# EAGLE board ControlParqueadero (EAGLE 5.07)
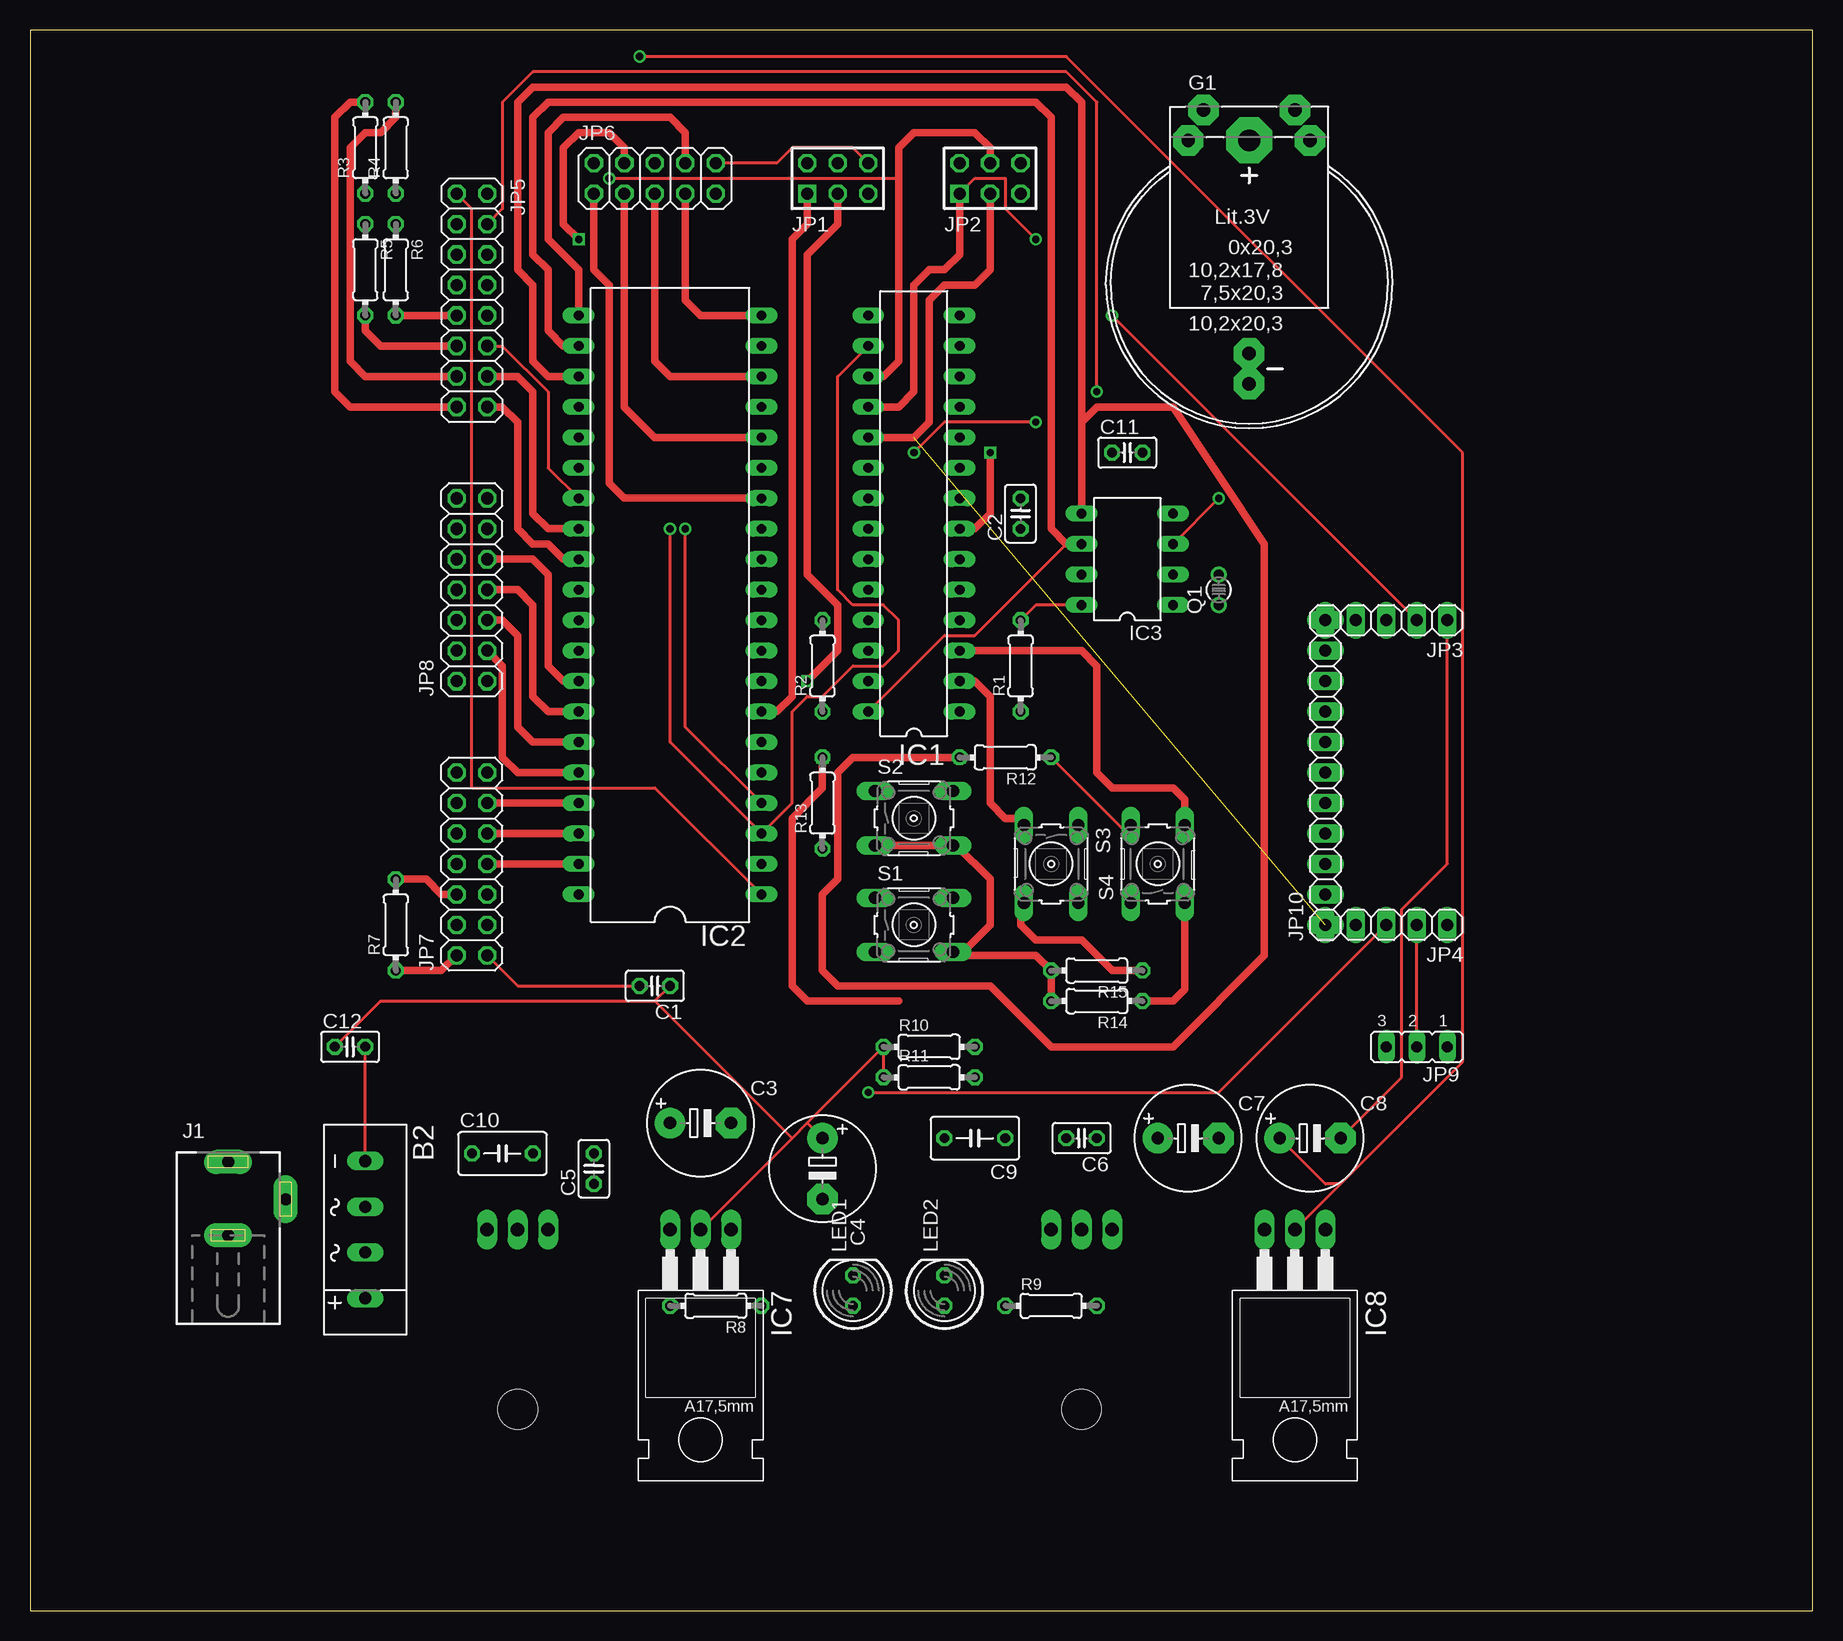
[diagram p0: board, top side]
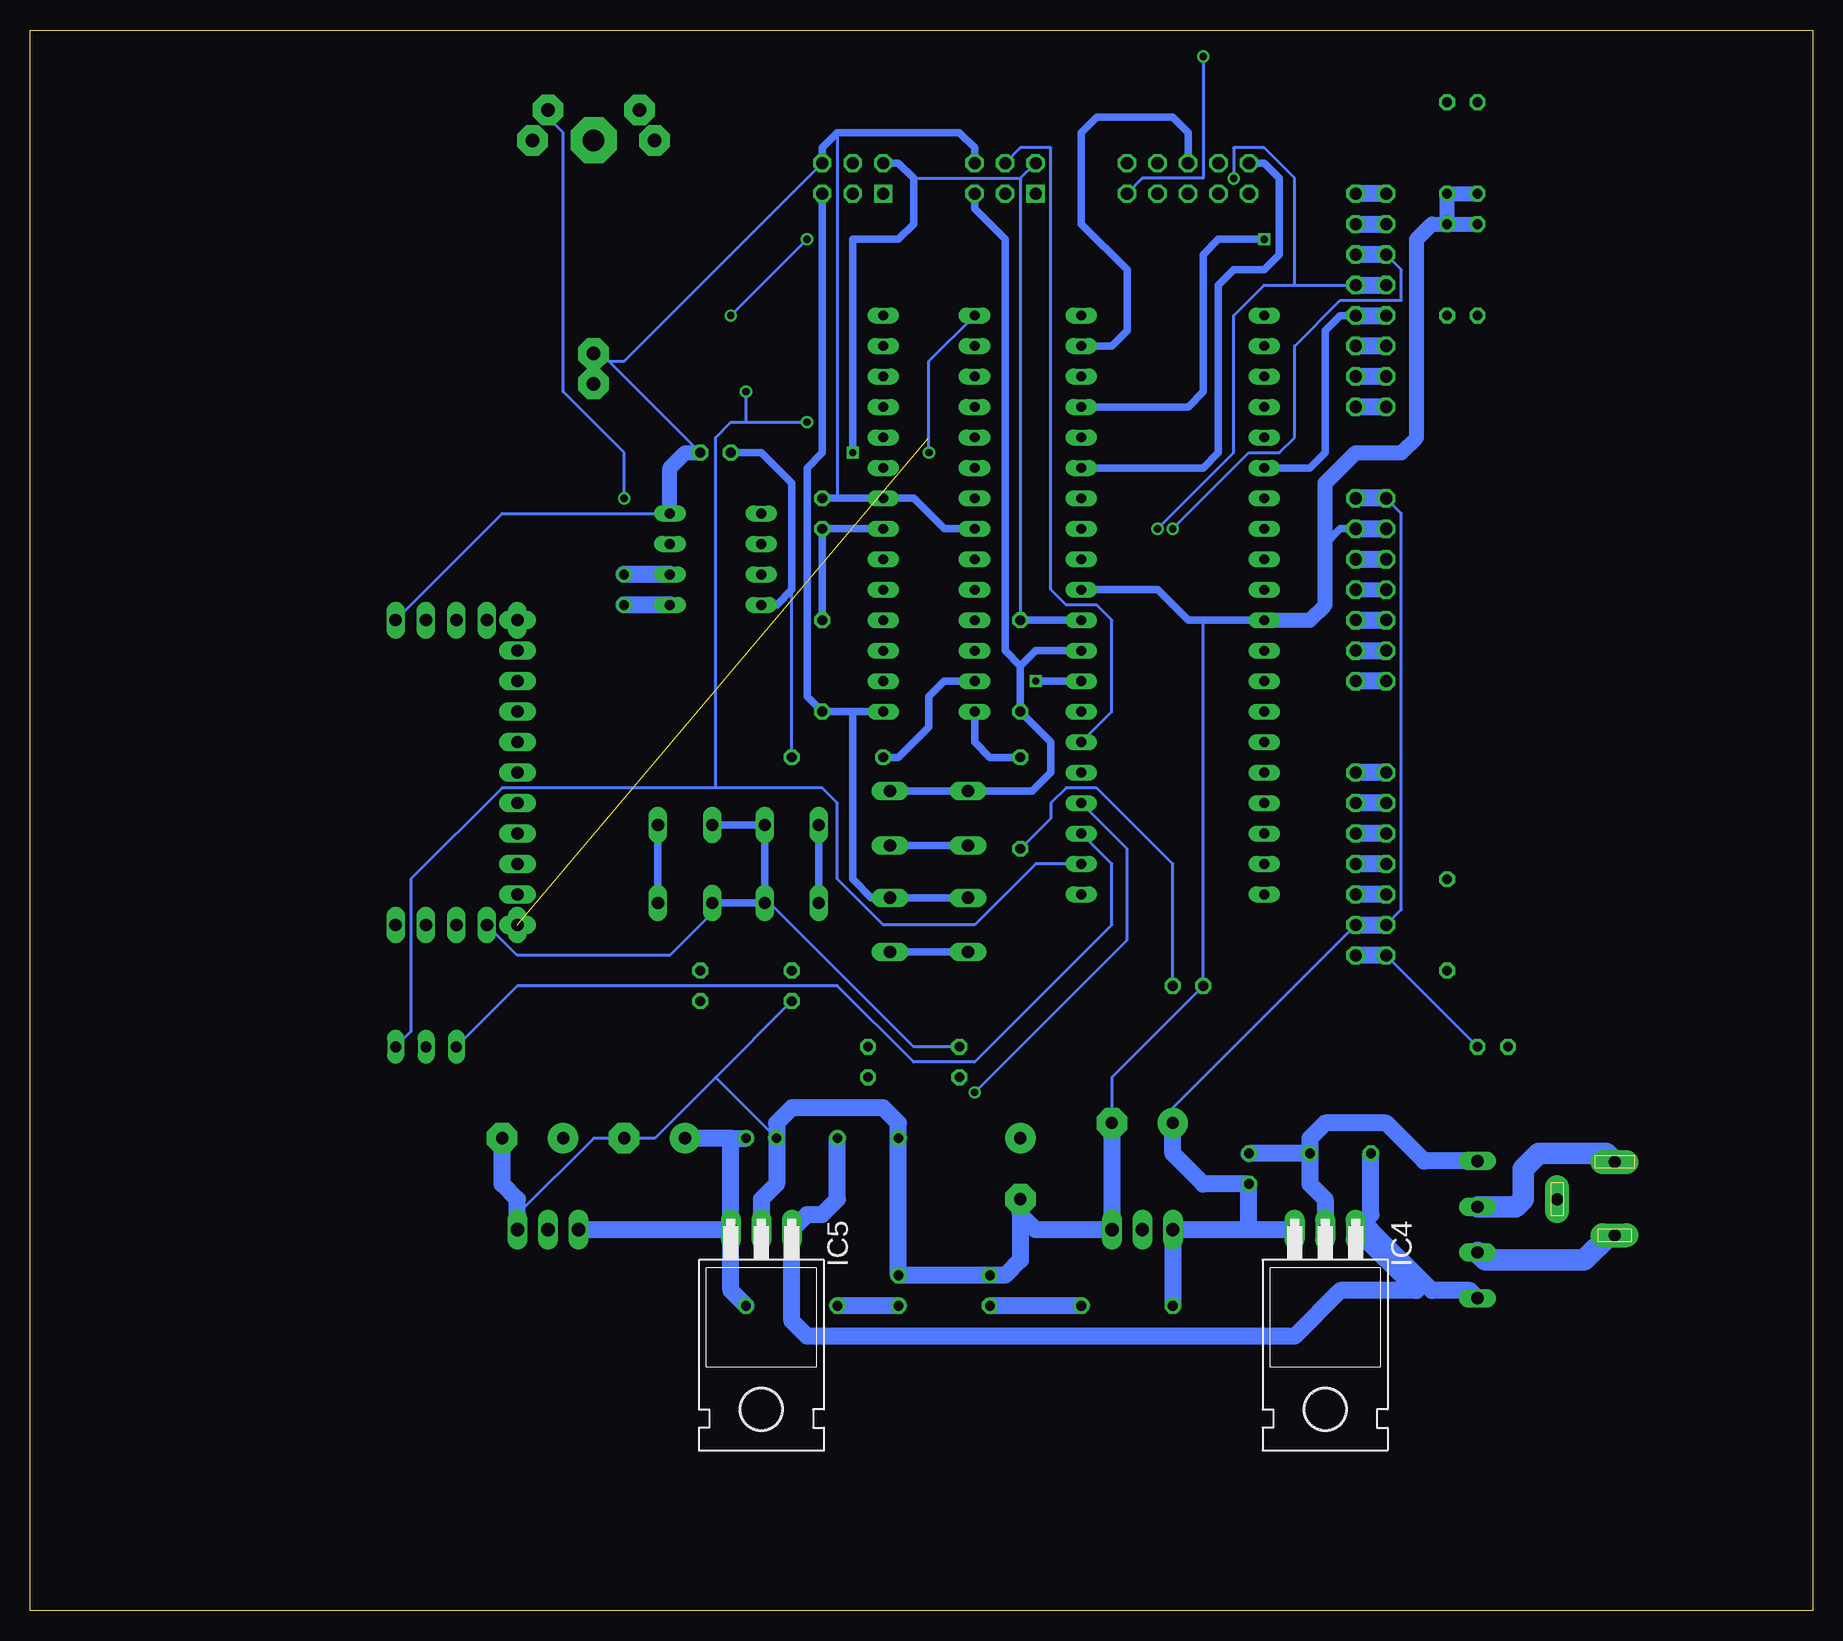
[diagram p1: board, bottom side, seen from below]

Size 148.57 x 131.75 mm. Coordinates in mm from the lower left corner, seen from the top.
Outline: 0,0 148.57,0 148.57,131.75 0,131.75 0,0
Copper layers (1*16): Top 0.035mm / dielectric 1.5mm / Bottom 0.035mm
Design rules "default": minimum track width 10mil, minimum drill 24mil, track to track 8mil, track to pad 8mil, pad to pad 8mil, via to via 8mil, smd to smd 8mil, copper to edge 40mil, drill to drill 8mil, minimum pad ring 10mil, minimum via ring 8mil, stop-mask expansion 4mil, vias tented up to drill 0mil, thermal gap 10mil

## Footprints (pad centres in the part's own frame; a part is rotated, then mirrored left to right if it is on the bottom)
2KBP = drill 1.016 long: + 5.715,0; - -5.715,0; AC1 -1.905,0; AC2 1.905,0
C025-025X050 = drill 0.813 octagon: 1 -1.27,0; 2 1.27,0
E5-8,5 = drill 1.016 pad 2.54 round: + -2.54,0 | drill 1.016 pad 2.54 octagon: - 2.54,0
C050-035X075 = drill 0.813 octagon: 1 -2.54,0; 2 2.54,0
B2430UNI = drill 1.118 pad 2.54 octagon: + 3.81,14.605; +@1 -3.81,14.605; +@2 -5.08,12.065; +@3 5.08,12.065; - 0,-5.715; -@1 0,-8.255 | drill 1.803 pad 3.81 octagon: +@4 0,12.065
DIL28-3 = drill 0.813 long: 1 -16.51,-3.81; 2 -13.97,-3.81; 3 -11.43,-3.81; 4 -8.89,-3.81; 5 -6.35,-3.81; 6 -3.81,-3.81; 7 -1.27,-3.81; 8 1.27,-3.81; 9 3.81,-3.81; 10 6.35,-3.81; 11 8.89,-3.81; 12 11.43,-3.81; 13 13.97,-3.81; 14 16.51,-3.81; 15 16.51,3.81; 16 13.97,3.81; 17 11.43,3.81; 18 8.89,3.81; 19 6.35,3.81; 20 3.81,3.81; 21 1.27,3.81; 22 -1.27,3.81; 23 -3.81,3.81; 24 -6.35,3.81; 25 -8.89,3.81; 26 -11.43,3.81; 27 -13.97,3.81; 28 -16.51,3.81
DIL40 = drill 0.813 long: 1 -24.13,-7.62; 2 -21.59,-7.62; 3 -19.05,-7.62; 4 -16.51,-7.62; 5 -13.97,-7.62; 6 -11.43,-7.62; 7 -8.89,-7.62; 8 -6.35,-7.62; 9 -3.81,-7.62; 10 -1.27,-7.62; 11 1.27,-7.62; 12 3.81,-7.62; 13 6.35,-7.62; 14 8.89,-7.62; 15 11.43,-7.62; 16 13.97,-7.62; 17 16.51,-7.62; 18 19.05,-7.62; 19 21.59,-7.62; 20 24.13,-7.62; 21 24.13,7.62; 22 21.59,7.62; 23 19.05,7.62; 24 16.51,7.62; 25 13.97,7.62; 26 11.43,7.62; 27 8.89,7.62; 28 6.35,7.62; 29 3.81,7.62; 30 1.27,7.62; 31 -1.27,7.62; 32 -3.81,7.62; 33 -6.35,7.62; 34 -8.89,7.62; 35 -11.43,7.62; 36 -13.97,7.62; 37 -16.51,7.62; 38 -19.05,7.62; 39 -21.59,7.62; 40 -24.13,7.62
DIL08 = drill 0.813 long: 1 -3.81,-3.81; 2 -1.27,-3.81; 3 1.27,-3.81; 4 3.81,-3.81; 5 3.81,3.81; 6 1.27,3.81; 7 -1.27,3.81; 8 -3.81,3.81
TO220H = drill 1.118 long: 1 -2.54,-10.16; 2 0,-10.16; 3 2.54,-10.16 | hole 3.302: 0,4.826
TO220 = drill 1.118 long: 1 -2.54,-6.35; 2 0,-6.35; 3 2.54,-6.35
DCJ0202 = drill 1 pad 2 long: 1 0,3.1; 2 4.8,0; 3 0,-3
AVR-ISP-6 = drill 1.016 square: 1 -2.54,-1.27 | drill 1.016 octagon: 2 -2.54,1.27; 3 0,-1.27; 4 0,1.27; 5 2.54,-1.27; 6 2.54,1.27
1X05 = drill 1.016 long: 1 -5.08,0; 2 -2.54,0; 3 0,0; 4 2.54,0; 5 5.08,0
2X08 = drill 1.016 octagon: 1 -8.89,-1.27; 2 -8.89,1.27; 3 -6.35,-1.27; 4 -6.35,1.27; 5 -3.81,-1.27; 6 -3.81,1.27; 7 -1.27,-1.27; 8 -1.27,1.27; 9 1.27,-1.27; 10 1.27,1.27; 11 3.81,-1.27; 12 3.81,1.27; 13 6.35,-1.27; 14 6.35,1.27; 15 8.89,-1.27; 16 8.89,1.27
2X05 = drill 1.016 octagon: 1 -5.08,-1.27; 2 -5.08,1.27; 3 -2.54,-1.27; 4 -2.54,1.27; 5 0,-1.27; 6 0,1.27; 7 2.54,-1.27; 8 2.54,1.27; 9 5.08,-1.27; 10 5.08,1.27
2X07 = drill 1.016 octagon: 1 -7.62,-1.27; 2 -7.62,1.27; 3 -5.08,-1.27; 4 -5.08,1.27; 5 -2.54,-1.27; 6 -2.54,1.27; 7 0,-1.27; 8 0,1.27; 9 2.54,-1.27; 10 2.54,1.27; 11 5.08,-1.27; 12 5.08,1.27; 13 7.62,-1.27; 14 7.62,1.27
JP2 = drill 0.914 long: 1 -2.54,0; 2 0,0; 3 2.54,0
1X11 = drill 1.016 long: 1 -12.7,0; 2 -10.16,0; 3 -7.62,0; 4 -5.08,0; 5 -2.54,0; 6 0,0; 7 2.54,0; 8 5.08,0; 9 7.62,0; 10 10.16,0; 11 12.7,0
LED5MM = drill 0.813 octagon: A -1.27,0; K 1.27,0
TC26V = drill 0.813 round: 1 -1.27,0; 2 1.27,0
0204/7 = drill 0.813 octagon: 1 -3.81,0; 2 3.81,0
B3F-10XX = drill 1.016 long: 1 -3.251,2.261; 2 3.251,2.261; 3 -3.251,-2.261; 4 3.251,-2.261

## Placement (x,y rotation side)
B2  RECTIFIER-2KBP  [2KBP]  27.94,31.75 270 top
C1  [C025-025X050]  52.07,52.07 180 top
C2  [C025-025X050]  82.55,91.44 90 top
C3  [E5-8,5]  55.88,40.64 0 top
C4  [E5-8,5]  66.04,36.83 270 top
C5  0.1u  [C025-025X050]  46.99,36.83 90 top
C6  0.1u  [C025-025X050]  87.63,39.37 180 top
C7  [E5-8,5]  96.52,39.37 0 top
C8  [E5-8,5]  106.68,39.37 0 top
C9  0.33u  [C050-035X075]  78.74,39.37 180 top
C10  0.33u  [C050-035X075]  39.37,38.1 0 top
C11  [C025-025X050]  91.44,96.52 0 top
C12  [C025-025X050]  26.67,46.99 0 top
G1  B2430UNI  [B2430UNI]  101.6,110.49 0 top
IC1  ATMEGA48/88/168-PU  [DIL28-3]  73.66,91.44 90 top
IC2  MEGA164P/324P/644P-PU  [DIL40]  53.34,83.82 90 top
IC3  DS1307  [DIL08]  91.44,87.63 90 top
IC4  7805T  [TO220H]  40.64,21.59 180 bottom
IC5  7805T  [TO220H]  87.63,21.59 180 bottom
IC7  LM1117T-ADJ  [TO220]  55.88,25.4 180 top
IC8  LM1117T-ADJ  [TO220]  105.41,25.4 180 top
J1  DCJ0202  [DCJ0202]  16.51,34.29 0 top
JP1  AVR-ISP-6  [AVR-ISP-6]  67.31,119.38 0 top
JP2  AVR-ISP-6  [AVR-ISP-6]  80.01,119.38 0 top
JP3  [1X05]  113.03,82.55 180 top
JP4  [1X05]  113.03,57.15 180 top
JP5  [2X08]  36.83,109.22 270 top
JP6  [2X05]  52.07,119.38 0 top
JP7  [2X07]  36.83,62.23 90 top
JP8  [2X07]  36.83,85.09 90 top
JP9  [JP2]  115.57,46.99 180 top
JP10  [1X11]  107.95,69.85 90 top
LED1  [LED5MM]  68.58,26.67 90 top
LED2  [LED5MM]  76.2,26.67 90 top
Q1  [TC26V]  99.06,85.09 90 top
R1  1K  [0204/7]  82.55,78.74 90 top
R2  1K  [0204/7]  66.04,78.74 90 top
R3  1K  [0204/7]  27.94,121.92 90 top
R4  1K  [0204/7]  30.48,121.92 90 top
R5  1K  [0204/7]  27.94,111.76 270 top
R6  1K  [0204/7]  30.48,111.76 270 top
R7  [0204/7]  30.48,57.15 90 top
R8  330  [0204/7]  57.15,25.4 180 top
R9  270  [0204/7]  85.09,25.4 0 top
R10  1K  [0204/7]  74.93,46.99 0 top
R11  1K  [0204/7]  74.93,44.45 0 top
R12  1K  [0204/7]  81.28,71.12 180 top
R13  1K  [0204/7]  66.04,67.31 90 top
R14  1K  [0204/7]  88.9,50.8 180 top
R15  1K  [0204/7]  88.9,53.34 180 top
S1  [B3F-10XX]  73.66,57.15 0 top
S2  [B3F-10XX]  73.66,66.04 0 top
S3  [B3F-10XX]  85.09,62.23 270 top
S4  [B3F-10XX]  93.98,62.23 90 top

## Library data of the parts
B2 = rectifier
C1-C12 R1-R15 = rcl
G1 = battery
IC1 = atmega8
IC2 JP1 JP2 = avr-6
IC3 = ds1307_pcf8583
IC4 IC5 = linear
IC7 IC8 = lm1117
J1 = con-jack
JP3-JP8 JP10 = pinhead
JP9 = jumper
LED1 LED2 = led
Q1 = crystal
S1-S4 = switch-omron

## Nets
+3V3: C1.1 C2.1 C4.+ C11.1 C12.1 IC1.7 IC2.10 IC3.8 IC7.2 JP1.2 JP2.2 JP4.4 R1.2 R2.2 R10.1 R11.1 R12.1 R13.1 S3.1 S3.2 S4.1 S4.2
+5V: C3.+ C5.1 IC4.3 IC7.3 JP7.3 JP7.4 JP8.13 JP8.14 R8.2
+5V/1: C6.1 C7.+ IC5.3 IC8.3 R9.2
+9V: B2.+ C9.1 C10.1 IC4.1 IC5.1
AREF: IC2.32
AVCC: IC2.30
GND: B2.- C1.2 C2.2 C3.- C4.- C5.2 C6.2 C7.- C8.- C9.2 C10.2 C11.2 C12.2 G1.- IC1.8 IC1.22 IC2.11 IC2.31 IC3.4 IC4.2 IC5.2 IC7.1 IC8.1 JP1.6 JP2.6 JP3.1 JP6.10 JP7.1 JP7.2 JP8.11 JP8.12 LED1.K LED2.K R3.1 R4.1 R5.1 R6.1 R7.1 R14.2 R15.2 S1.3 S1.4 S2.3 S2.4
N$1: IC1.1 JP2.5 R1.1 S1.1 S1.2
N$2: IC1.2 R15.1 S3.3 S3.4
N$3: IC2.9 JP1.5 R2.1 S2.1 S2.2
N$4: IC1.3 R14.1 S4.3 S4.4
N$5: JP4.2 JP9.2
N$6: IC2.7 JP1.1
N$7: IC2.6 JP1.4
N$8: IC2.8 JP1.3
N$9: IC1.27 IC2.23 IC3.5 R12.2
N$11: IC1.28 IC2.22 IC3.6 R13.2
N$13: IC2.28 JP5.13 JP5.14 R4.2
N$16: IC2.26 JP5.9 JP5.10 R6.2
N$18: IC2.27 JP5.11 JP5.12 R5.2
N$19: IC3.2 Q1.2
N$20: IC2.29 JP5.15 JP5.16 R3.2
N$21: LED1.A R8.1
N$22: G1.+ IC3.3
N$23: B2.AC1 J1.1
N$24: B2.AC2 J1.3
N$25: LED2.A R9.1
N$27: IC2.33 JP8.9 JP8.10
N$28: IC2.34 JP8.7 JP8.8
N$29: IC2.35 JP8.5 JP8.6
N$30: IC2.36 JP8.3 JP8.4
N$32: IC3.1 Q1.1
N$37: JP7.5 JP7.6 R7.2
N$38: IC2.39 JP7.7 JP7.8
N$39: IC2.38 JP7.9 JP7.10
N$40: IC2.37 JP7.11 JP7.12
N$41: JP7.13 JP7.14
N$42: JP8.1 JP8.2
PORTB0: IC2.1 JP5.1 JP5.2
PORTB1: IC1.15 IC2.2 JP5.3 JP5.4 JP9.1
PORTB2: IC1.16 IC2.3 JP5.5 JP5.6 JP9.3
PORTB3: IC1.17 IC2.4 JP2.4 JP4.3 JP5.7 JP5.8
PORTB4: IC1.18 JP2.1 JP3.2
PORTB5: IC1.19 JP2.3 JP4.5
PORTC0: IC2.14 JP6.1
PORTC1: IC2.15 JP6.2
PORTC2: IC2.16 JP6.3
PORTC3: IC2.17 JP6.4
PORTC4: IC2.18 JP6.5
PORTC5: IC2.19 JP6.6
PORTC6: IC2.20 JP6.7
PORTC7: IC2.21 JP6.8
VCC: C8.+ IC8.2 JP6.9

## Tracks (layer width: path | path; a pad name or v marks a point on that pad's centre or on a via)
+3V3  (via drill 0.6)
  Top 0.254: R11.1 R10.1 64.77,40.64 | 63.5,39.37 64.77,40.64 | 63.5,39.37 IC7.2 | 64.77,40.64 C4.+ | C12.1 29.21,50.8 52.07,50.8 | 52.07,50.8 C1.1 | 52.07,50.8 63.5,39.37 | R12.1 91.44,64.77 S4.2 | IC3.8 83.82,83.82 R1.2
  Top 0.61: v80.01,96.52 80.01,91.44 78.74,90.17 IC1.7
  Bottom 0.254: R13.1 63.5,66.04 63.5,67.31 62.23,68.58 59.69,68.58 53.34,62.23 C1.1 | JP4.4 107.95,54.61 95.25,54.61 91.44,58.42 S4.1 | 66.04,119.38 JP1.2 | 74.93,119.38 66.04,119.38 | 66.04,119.38 R2.2 | R12.1 85.09,85.09 | R10.1 74.93,46.99 87.63,59.69 S3.2
  Bottom 0.61: R2.2 IC2.10 | S3.1 S3.2 S4.1 | S3.1 S4.2 | S3.1 87.35,65.05 87.63,64.77 | IC1.7 C2.1 R1.2 | JP2.2 76.2,120.65 74.93,119.38 74.93,115.57 76.2,114.3 80.01,114.3 v80.01,96.52 | C11.1 87.63,96.52 85.09,93.98 85.09,85.09 86.36,83.82 IC3.8
+5V
  Bottom 0.254: JP7.3 53.34,41.91 C3.+ | JP8.14 34.29,91.44 34.29,58.42 JP7.4
  Bottom 1.422: IC4.3 46.99,31.75 | 46.99,31.75 IC7.3 R8.2 | 46.99,31.75 C5.1 50.8,35.56 53.34,38.1 C3.+ | JP8.14 JP8.13 | JP7.3 JP7.4
+5V/1
  Bottom 1.422: IC5.3 90.17,39.37 | 90.17,39.37 C6.1 | 90.17,39.37 C7.+ | R9.2 90.17,26.67 IC5.3 | IC5.3 IC8.3
+9V
  Bottom 1.422: IC4.1 36.83,31.75 31.75,26.67 28.57,26.67 B2.+ | IC4.1 36.83,33.02 C10.1 | IC4.1 33.02,26.67 39.37,26.67 43.18,22.86 83.82,22.86 85.09,24.13 IC5.1 83.82,33.02 82.55,33.02 81.28,34.29 C9.1
GND
  Top 0.254: JP6.10 62.23,120.65 63.5,121.92 68.58,121.92 JP1.6 | B2.- C12.2 | C1.2 40.64,52.07 JP7.1 | JP3.1 118.11,62.23 114.3,58.42 114.3,44.45 C8.-
  Top 0.61: R14.2 R15.2 83.82,54.61 77.47,54.61 | 77.47,54.61 77.19,54.61 S1.4 | JP7.2 34.29,53.34 R7.1 | S2.3 77.19,63.78 80.01,60.96 80.01,57.15 77.47,54.61
  Bottom 0.254: JP3.1 109.22,91.44 IC3.4 | 100.33,104.14 101.6,104.14 G1.- | C11.2 100.33,104.14 | JP2.6 99.06,104.14 100.33,104.14 | 81.28,123.19 81.28,92.71 | 107.95,33.02 101.6,39.37 C7.- 96.52,39.37 91.44,44.45 | 91.44,44.45 R14.2 | C6.2 91.44,44.45 | C12.2 JP7.2 | C3.- 58.42,44.45 C1.2 50.8,82.55
  Bottom 0.61: JP8.11 39.37,90.17 40.64,88.9 40.64,83.82 | S1.4 S1.3 | S2.3 S2.4 | C2.2 81.28,92.71 IC1.8 74.93,92.71 72.39,90.17 IC1.22 | JP2.6 82.55,121.92 81.28,123.19 71.12,123.19 69.85,121.92 JP1.6 | IC2.31 50.8,82.55 52.07,82.55 54.61,85.09 IC2.11
  Bottom 1.27: R6.1 R5.1 | R3.1 R4.1 R6.1 | IC2.31 41.91,82.55 40.64,83.82 40.64,93.98 38.1,96.52 34.29,96.52 33.02,97.79 33.02,114.3 31.75,115.57 R6.1 | IC3.4 95.25,95.25 93.98,96.52 C11.2
  Bottom 1.422: IC4.2 40.64,34.29 41.91,35.56 C10.2 | C10.2 C5.2 | B2.- 32.39,37.47 35.56,40.64 40.64,40.64 41.91,39.37 C10.2 | C3.- IC7.1 64.77,31.75 66.04,33.02 | 66.04,33.02 66.04,29.21 67.31,27.94 LED1.K LED2.K C9.2 76.2,40.64 77.47,41.91 85.09,41.91 86.36,40.64 C6.2 86.36,35.56 87.63,34.29 IC5.2 | 66.04,33.02 C4.- | IC8.1 107.95,33.02 107.95,34.29 109.22,35.56 C8.- | JP8.11 JP8.12 | JP7.2 JP7.1
N$1
  Bottom 0.61: 80.01,74.93 R1.1 83.82,76.2 83.82,95.25 82.55,96.52 JP2.5 | 80.01,74.93 IC1.1 | S1.1 S1.2 78.46,59.41 80.01,60.96 80.01,74.93
N$2
  Top 0.61: IC1.2 78.74,77.47 80.01,76.2 80.01,67.31 81.28,66.04 82.27,66.04 S3.3 | R15.1 90.17,53.34 87.63,55.88 83.82,55.88 82.55,57.15 82.55,58.7 S3.4
  Bottom 0.61: S3.4 S3.3
N$3
  Bottom 0.61: S2.2 S2.1 65.05,68.3 63.5,69.85 63.5,72.39 R2.1 66.04,78.74 | 66.04,78.74 64.77,80.01 IC2.9 | JP1.5 69.85,116.84 67.31,114.3 67.31,80.01 66.04,78.74
N$4
  Top 0.61: S4.4 96.24,67.59 95.25,68.58 90.17,68.58 88.9,69.85 88.9,78.74 87.63,80.01 IC1.3 | S4.3 96.24,51.79 95.25,50.8 R14.1
  Bottom 0.61: S4.3 S4.4
N$5
  Top 0.254: JP9.2 JP4.2
N$6
  Top 0.61: JP1.1 64.77,115.57 63.5,114.3 63.5,76.2 62.23,74.93 IC2.7
N$7
  Bottom 0.254: IC2.6 58.42,74.93 58.42,82.55 59.69,83.82 62.23,83.82 63.5,85.09 63.5,121.92 66.04,121.92 JP1.4
N$8  (via drill 0.6)
  Top 0.61: v64.77,77.47 67.31,80.01 67.31,83.82 64.77,86.36 64.77,113.03 67.31,115.57 JP1.3
  Bottom 0.61: IC2.8 v64.77,77.47
N$9  (via drill 0.6)
  Top 0.61: 87.63,99.06 87.63,125.73 86.36,127 41.91,127 40.64,125.73 40.64,111.76 41.91,110.49 41.91,104.14 43.18,102.87 IC2.23 | 87.63,99.06 IC3.5 | 87.63,99.06 88.9,100.33 95.25,100.33 102.87,88.9 102.87,54.61 95.25,46.99 85.09,46.99 80.01,52.07 67.31,52.07 66.04,53.34 66.04,59.69 67.31,60.96 67.31,69.85 68.58,71.12 R12.2
  Bottom 0.61: IC1.27 72.39,77.47 73.66,76.2 73.66,73.66 76.2,71.12 R12.2
  other vias: 77.47,71.12
N$11  (via drill 0.6)
  Top 0.254: IC1.28 76.2,81.28 78.74,81.28 86.36,88.9
  Top 0.61: IC3.6 86.36,88.9 85.09,90.17 85.09,124.46 83.82,125.73 43.18,125.73 41.91,124.46 41.91,113.03 43.18,111.76 43.18,106.68 44.45,105.41 IC2.22 | R13.2 66.04,68.58 63.5,66.04 63.5,52.07 64.77,50.8 72.39,50.8
  Bottom 0.61: IC1.28 69.85,72.39 68.58,71.12 R13.2
  other vias: 66.04,71.12
N$13
  Top 0.61: JP5.14 40.64,102.87 41.91,101.6 41.91,91.44 43.18,90.17 IC2.28 | JP5.13 27.94,102.87 26.67,104.14 26.67,121.92 27.94,123.19 29.21,123.19 30.48,124.46 R4.2
  Bottom 1.422: JP5.13 JP5.14
N$16
  Top 0.61: JP5.9 R6.2
  Bottom 0.61: JP5.10 39.37,107.95 40.64,106.68 40.64,96.52 41.91,95.25 IC2.26
  Bottom 1.422: JP5.10 JP5.9
N$18
  Top 0.254: IC2.27 43.18,95.25 43.18,101.6 39.37,105.41 JP5.12
  Top 0.61: R5.2 27.94,106.68 29.21,105.41 JP5.11
  Bottom 1.422: JP5.11 JP5.12
N$19
  Bottom 1.422: IC3.2 Q1.2
N$20
  Top 0.61: IC2.29 44.45,87.63 43.18,88.9 41.91,88.9 40.64,90.17 40.64,99.06 39.37,100.33 JP5.16 | R3.2 26.67,125.73 25.4,124.46 25.4,101.6 26.67,100.33 JP5.15
  Bottom 1.422: JP5.15 JP5.16
N$21
  Bottom 1.422: R8.1 LED1.A
N$22  (via drill 0.61)
  Top 0.254: IC3.3 v99.06,92.71
  Bottom 0.254: v99.06,92.71 99.06,96.52 104.14,101.6 104.14,123.19 105.41,124.46 G1.+
N$23
  Bottom 1.778: B2.AC1 24.77,33.66 24.13,34.29 24.13,36.83 22.86,38.1 17.22,38.1 J1.1
N$24
  Bottom 1.778: J1.3 16.97,31.29 19.05,29.21 27.3,29.21 B2.AC2
N$25
  Bottom 1.422: LED2.A R9.1
N$27
  Top 0.61: JP8.9 41.91,87.63 43.18,86.36 43.18,78.74 44.45,77.47 IC2.33
  Bottom 1.422: JP8.9 JP8.10
N$28
  Top 0.61: JP8.7 40.64,85.09 41.91,83.82 41.91,76.2 43.18,74.93 IC2.34
  Bottom 1.27: JP8.7 JP8.8
N$29
  Top 0.61: JP8.5 39.37,82.55 40.64,81.28 40.64,73.66 41.91,72.39 IC2.35
  Bottom 1.422: JP8.5 JP8.6
N$30
  Top 0.61: JP8.3 39.37,78.74 39.37,71.12 40.64,69.85 IC2.36
  Bottom 1.422: JP8.3 JP8.4
N$32
  Bottom 1.422: IC3.1 Q1.1
N$37
  Top 0.61: R7.2 33.02,60.96 34.29,59.69 JP7.6
  Bottom 1.422: JP7.6 JP7.5
N$38
  Top 0.61: JP7.7 IC2.39
  Bottom 1.422: JP7.8 JP7.7
N$39
  Top 0.61: JP7.9 IC2.38
  Bottom 1.422: JP7.10 JP7.9
N$40
  Top 0.61: JP7.11 IC2.37
  Bottom 1.422: JP7.12 JP7.11
N$41
  Bottom 1.422: JP7.14 JP7.13
N$42
  Bottom 1.422: JP8.2 JP8.1
PORTB0
  Top 0.254: IC2.1 52.07,68.58 36.83,68.58 36.83,116.84 JP5.1
  Bottom 1.422: JP5.1 JP5.2
PORTB1  (via drill 0.61)
  Top 0.254: v73.66,96.52 76.2,99.06 v83.82,99.06 | JP5.4 39.37,116.84 39.37,125.73 41.91,128.27 86.36,128.27 88.9,125.73 v88.9,101.6
  Bottom 0.254: IC2.2 64.77,62.23 69.85,57.15 77.47,57.15 81.28,60.96 81.28,67.31 82.55,68.58 91.44,68.58 | 91.44,68.58 109.22,68.58 116.84,60.96 116.84,48.26 JP9.1 | IC1.15 73.66,104.14 v73.66,96.52 | 88.9,99.06 90.17,99.06 91.44,97.79 91.44,68.58 | 88.9,99.06 v83.82,99.06 | 88.9,99.06 v88.9,101.6
  Bottom 1.422: JP5.4 JP5.3
PORTB2  (via drill 0.61)
  Top 0.254: IC1.16 67.31,102.87 67.31,85.09 68.58,83.82 71.12,83.82 72.39,82.55 72.39,80.01 71.12,78.74 68.58,78.74 66.04,76.2 64.77,76.2 63.5,74.93 63.5,67.31 IC2.3 53.34,72.39 v53.34,90.17
  Bottom 0.254: IC2.3 58.42,62.23 58.42,57.15 69.85,45.72 74.93,45.72 81.28,52.07 107.95,52.07 JP9.3 | JP5.5 34.29,111.76 34.29,109.22 39.37,109.22 43.18,105.41 43.18,97.79 44.45,96.52 46.99,96.52 v53.34,90.17
  Bottom 1.422: JP5.5 JP5.6
PORTB3  (via drill 0.61)
  Top 0.254: IC2.4 54.61,73.66 v54.61,90.17 | JP4.3 99.06,43.18 v69.85,43.18 | v48.26,119.38 72.39,119.38
  Top 0.61: IC1.17 71.12,102.87 72.39,104.14 72.39,119.38 72.39,121.92 73.66,123.19 78.74,123.19 80.01,121.92 JP2.4
  Bottom 0.254: v54.61,90.17 48.26,96.52 48.26,107.95 45.72,110.49 43.18,110.49 | 43.18,110.49 JP5.8 | v69.85,43.18 57.15,55.88 57.15,63.5 IC2.4 | v48.26,119.38 48.26,121.92 45.72,121.92 43.18,119.38 43.18,110.49
  Bottom 1.422: JP5.8 JP5.7
PORTB4  (via drill 0.61)
  Top 0.254: v90.17,107.95 JP3.2 | v83.82,114.3 81.28,116.84 81.28,119.38 78.74,119.38 JP2.1
  Top 0.61: IC1.18 72.39,100.33 73.66,101.6 73.66,110.49 74.93,111.76 76.2,111.76 77.47,113.03 JP2.1
  Bottom 0.254: v83.82,114.3 v90.17,107.95
PORTB5  (1 unrouted)
  Top 0.61: IC1.19 73.66,97.79 74.93,99.06 74.93,109.22 76.2,110.49 78.74,110.49 80.01,111.76 JP2.3
PORTC0
  Top 0.61: IC2.14 49.53,92.71 48.26,93.98 48.26,110.49 46.99,111.76 JP6.1
PORTC1
  Bottom 0.61: IC2.15 50.8,95.25 49.53,96.52 49.53,110.49 48.26,111.76 45.72,111.76 44.45,113.03 44.45,119.38 45.72,120.65 JP6.2
PORTC2
  Top 0.61: IC2.16 52.07,97.79 49.53,100.33 JP6.3
PORTC3  (via drill 0.6)
  Top 0.61: v45.72,114.3 44.45,115.57 44.45,121.92 45.72,123.19 48.26,123.19 49.53,121.92 JP6.4
  Bottom 0.61: IC2.17 52.07,100.33 50.8,101.6 50.8,113.03 49.53,114.3 v45.72,114.3
PORTC4
  Top 0.61: IC2.18 53.34,102.87 52.07,104.14 JP6.5
PORTC5
  Bottom 0.61: JP6.6 52.07,123.19 53.34,124.46 59.69,124.46 60.96,123.19 60.96,115.57 57.15,111.76 57.15,106.68 58.42,105.41 IC2.19
PORTC6
  Top 0.61: IC2.20 55.88,107.95 54.61,109.22 JP6.7
PORTC7
  Top 0.61: IC2.21 45.72,111.76 43.18,114.3 43.18,123.19 44.45,124.46 53.34,124.46 54.61,123.19 JP6.8
VCC  (via drill 0.61)
  Top 0.254: v50.8,129.54 86.36,129.54 119.38,96.52 119.38,45.72 109.22,35.56 | IC8.2 109.22,35.56 | C8.+ 107.95,35.56 109.22,35.56
  Bottom 0.254: JP6.9 55.88,119.38 50.8,119.38 v50.8,129.54